# Altium PCB chargerNewD.PcbDoc
Units mm, origin at the board's own origin, x right, y up, seen from the top; angles counter-clockwise.
Board outline 152.4 x 101.6 mm, 2 copper layers (Top Layer, Bottom Layer); 20 components, 12 nets, 55 pads, 0 vias.
Unrouted connection lines stored in the file: 38.
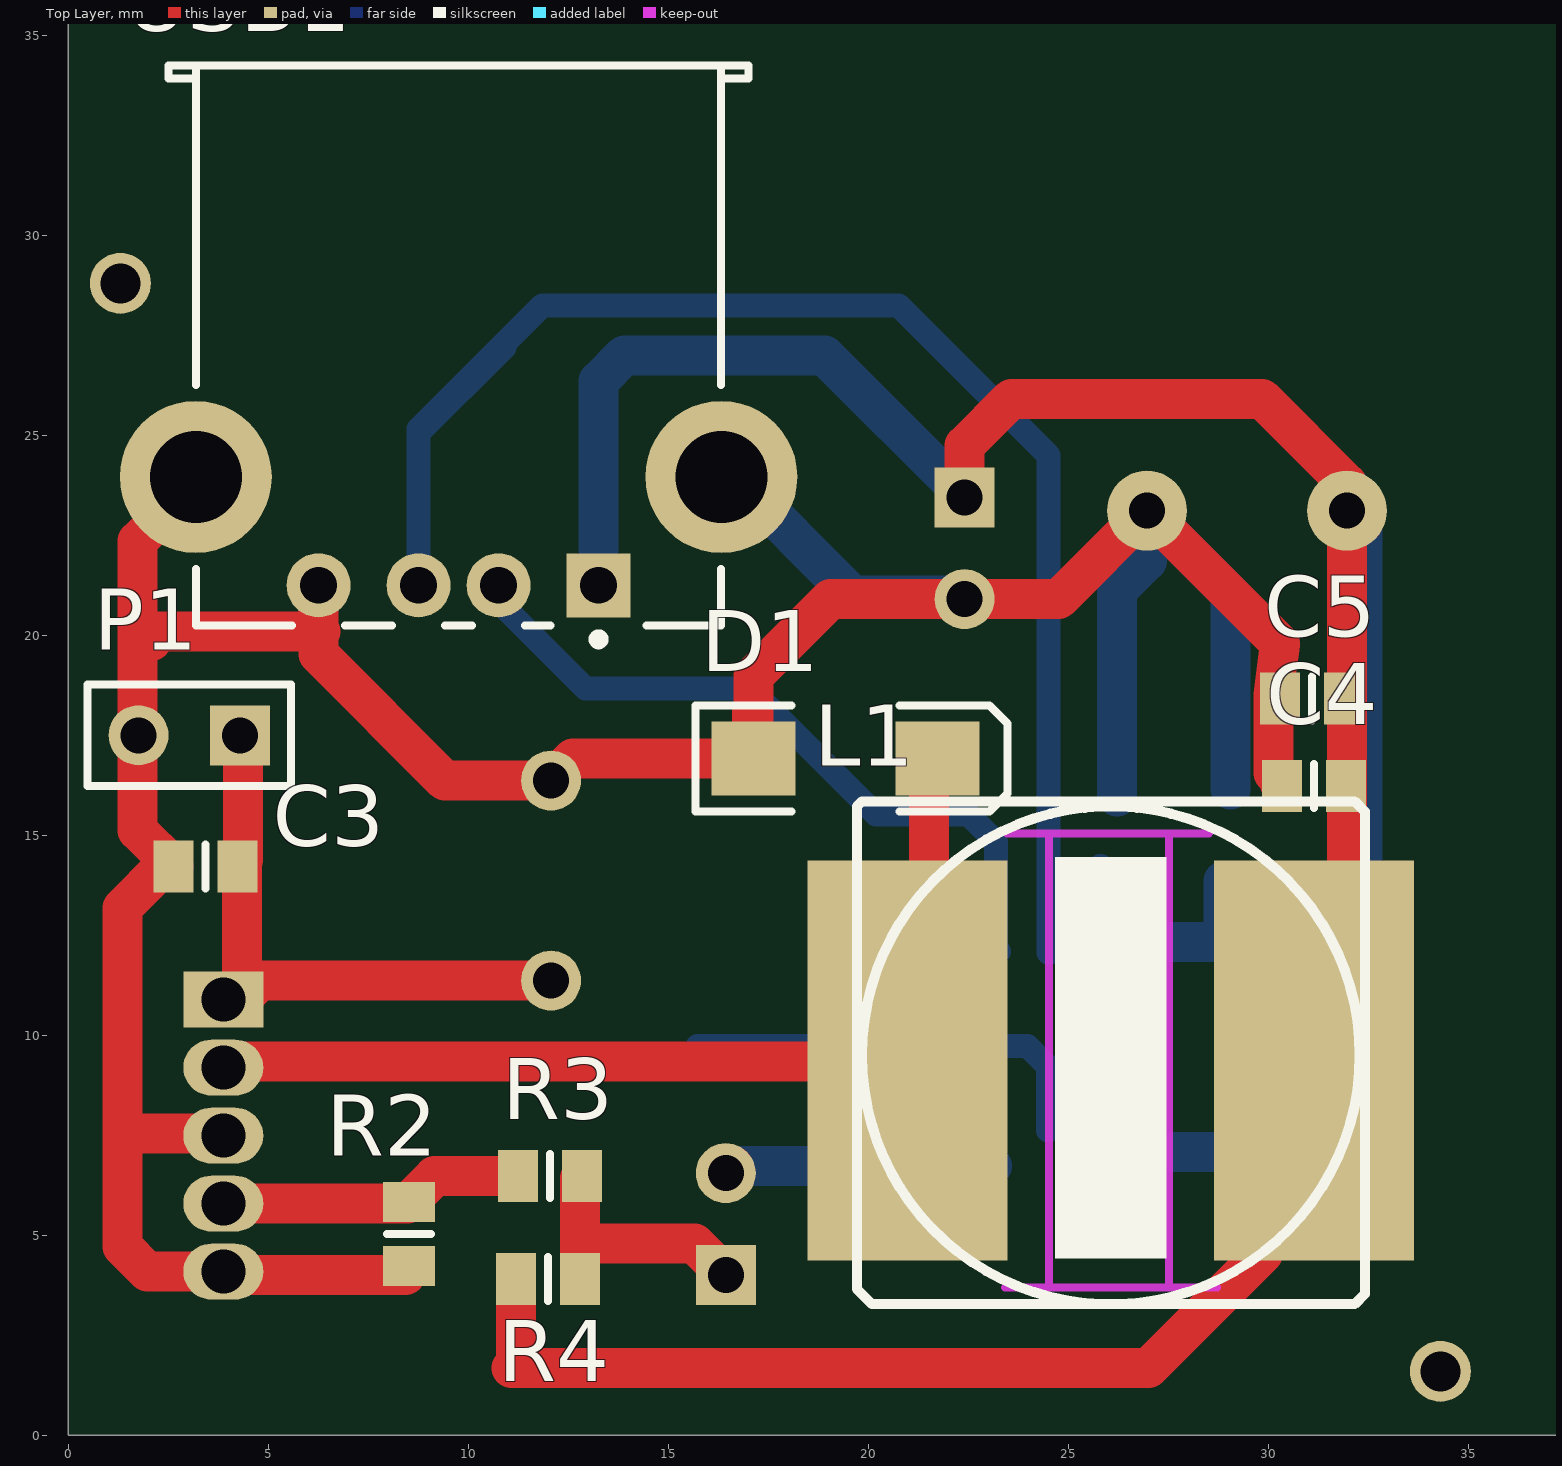
[diagram p0: Top Layer view]
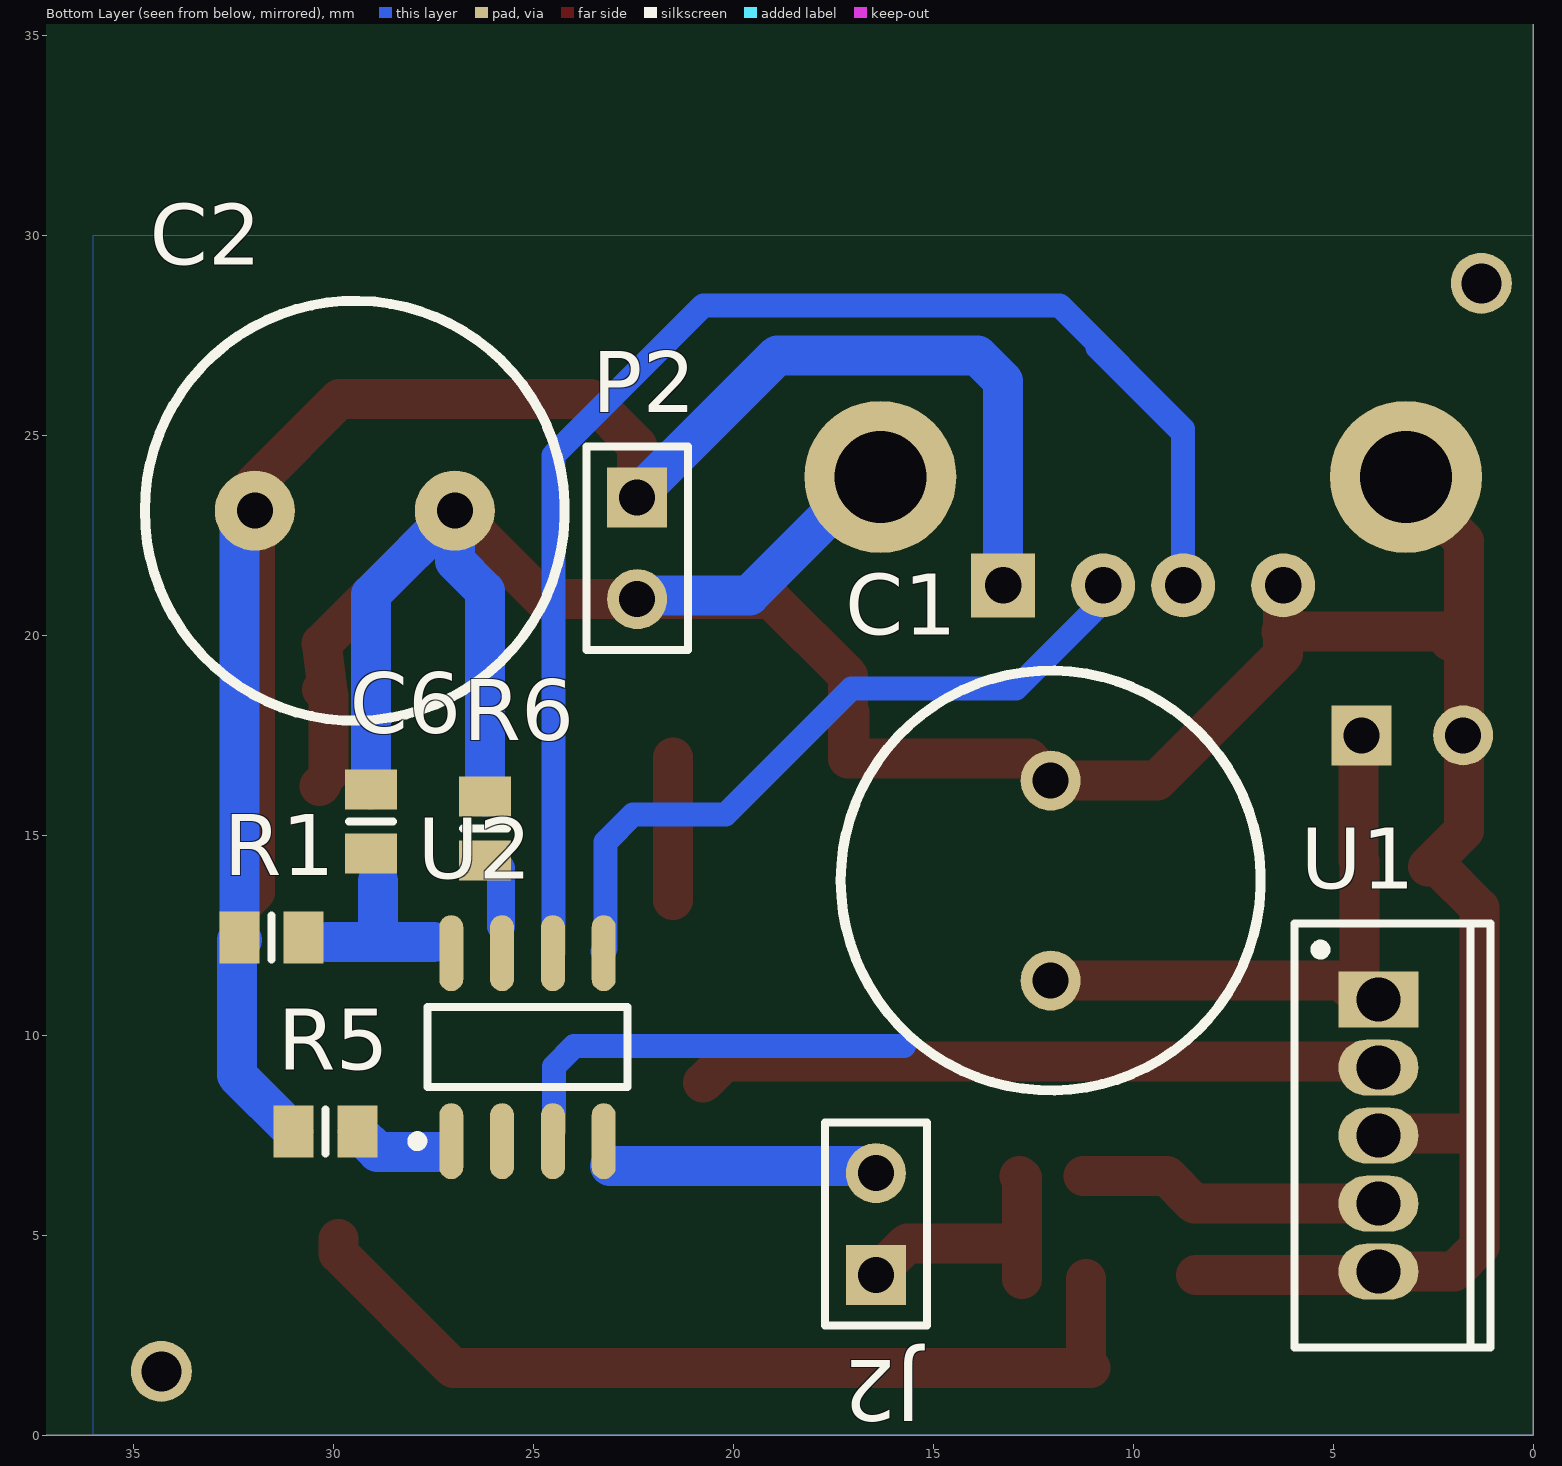
[diagram p1: Bottom Layer view, seen from below]

## Layer stack, top to bottom
Top Solder: solder mask 0.0102, Solder Resist, Dk 3.5
Top Layer: signal copper 0.0356
Dielectric 1: dielectric 0.32, FR-4, Dk 4.8
Bottom Layer: signal copper 0.0356
Bottom Solder: solder mask 0.0102, Solder Resist, Dk 3.5

## Board outline
0,0 152.4,0 152.4,101.6 0,101.6

## Design rules (kind name [scope] priority, off if disabled: settings)
Clearance [All] p1: gap=1.2 ignorepadtopadclearanceinfootprint=FALSE
PolygonConnect [All] p1: connectstyle=Relief reliefconductorwidth=0.254 reliefentries=4 polygonreliefangle="90 Angle" airgapwidth=0.254
RoutingVias [All] p1: holewidth=0.711 width=1.27 viastyle="Through Hole" minholewidth=0.711 minwidth=1.27 maxholewidth=0.711 maxwidth=1.27
SolderMaskExpansion [All] p1: expansion=0.102
Width [All] p1: maxlimit=0.762 minlimit=0.254 preferedwidth=0.254
30 further rules are at their usual default settings.

## Components (designator, comment, footprint, x,y, rotation, side; value= is the part's Value field where it differs from the comment)
C1 "Cap Pol1" RB5-10.5#1 12.065,13.868 r90 bottom value=470uf
C2 "Cap Pol1" RB5-10.5#2 29.464,23.114 r180 bottom value=470uf
C3 "Cap" 6-0805_L 3.429,14.224 r0 top value=100nf
C4 "Cap" 6-0805_L 31.14,16.231 r180 top value=100nf
C5 "Cap" 6-0805_L 31.09,18.415 r180 top value=100nf
C6 "Cap" 6-0805_L 29.058,15.342 r90 bottom value=100nf
D1 "SS34" DO214 19.431,16.916 r0 top
J2 "JUMPER" HDR1X2 16.434,4.013 r90 bottom
L1 "Inductor" IND_SMD-13.0mm 26.06,9.5 r0 top value=33mH
P1 "Header 2H" HDR1X2 4.293,17.501 r180 top
P2 "Header 2H" HDR1X2 22.403,23.444 r270 bottom
R1 "Res1" 6-0805_L 31.547,12.446 r0 bottom value=2K2
R2 "Res1" 6-0805_L 8.509,5.029 r90 top value=33k
R3 "Res1" 6-0805_L 12.04,6.477 r180 top value=1K
R4 "Res1" 6-0805_L 11.989,3.912 r0 top value=100K
R5 "Res1" 6-0805_L 30.201,7.595 r0 bottom value=2K2
R6 "Res1" 6-0805_L 26.213,15.164 r90 bottom value=38K3
U1 "LM2596-ADJ" T05A 3.872,7.493 r270 bottom
U2 "CHY103" "8 pin SOIC_L" 25.146,9.703 r90 bottom
USB1 "USB Connector-B Type" USB2.5-2H4C 9.754,34.239 r90 top

## Footprints (in the part's own frame and the unit in brackets; to place one, negate y for a bottom-side part, rotate by r counter-clockwise, add the part's x,y. Pads: shape width x height; smd on the part's side, far side on the other; paste and mask are expansions set on the pad)
6-0805_L [mm] "Chip Resistor, Body 2.0x1.2mm, IPC High Density"
  rect 1x1.3 smd: 1(-0.8,0) 2(0.8,0)
  silkscreen extent 0,-0.55 0,0.55, body extent -1.07,-0.7 1.07,0.7, height 0.7
"8 pin SOIC_L" [mm] "8-Pin Small Outline Integrated Circuit 1.27 mm Pitch, IPC High Density"
  oval 1.9x0.6 smd: 1(-2.35,1.905) 2(-2.35,0.635) 3(-2.35,-0.635) 4(-2.35,-1.905) 5(2.35,-1.905) 6(2.35,-0.635) 7(2.35,0.635) 8(2.35,1.905)
  silkscreen extent -2.47,-2.5 1,2.88, body extent -1.95,-2.45 1.95,2.45, height 1.91
DO214 [mm] "DO-214-AC/SMA; 2 C-Bend Leads; Body 5.3 x 2.6 mm, inc. leads (LxW)"
  rect 2.1x1.85 smd: 1(-2.3,0) 2(2.3,0)
  silkscreen extent -3.75,-1.33 4.05,1.33
HDR1X2 [mm] "Connector; Header; 2 Position"
  rect 1.5x1.5 hole 0.9: 1(0,0)
  round 1.5 hole 0.9: 2(2.54,0)
  silkscreen extent -1.27,-1.27 3.81,1.27
IND_SMD-13.0mm [mm]
  rect 5x10 smd: 1(-5.08,-0.127) 2(5.08,-0.127)
  Top Layer keep-out lines w0.2: -2.65,-5.8 2.65,-5.8 ; -2.6,5.55 2.45,5.55 ; -1.55,-5.8 -1.55,5.55 ; 1.45,-5.75 1.45,5.5
  silkscreen extent -6.35,-6.22 6.35,6.35, body extent -6.2,-6.3 6.3,6.2, height 6.1
RB5-10.5#1 [mm] "Capacitor (Radial); 2 Leads"
  round 1.5 hole 0.9: 1(-2.5,0) 2(2.5,0)
  silkscreen extent -5.25,-5.25 5.25,5.25
RB5-10.5#2 [mm] "Capacitor (Radial); 2 Leads"
  round 2 hole 0.9: 1(-2.5,0) 2(2.5,0)
  silkscreen extent -5.25,-5.25 5.25,5.25
T05A [mm] "TO, Thru-Hole, Vertical, Heatsink Mounted; 5 In-Line Leads; Pitch 1.70 mm"
  rect 1.4x2 hole 1.1: 1(-3.4,0)
  oval 1.4x2 hole 1.1: 2(-1.7,0) 3(0,0) 4(1.7,0) 5(3.4,0)
  silkscreen extent -5.3,-2.1 5.3,2.8, body extent -5.35,-2.15 5.35,2.85, height 15.9
USB2.5-2H4C [mm] "Connector; USB1.1, Type A, Thru-Hole; 4 Position; Right Angle"
  rect 1.6x1.6 hole 0.92: 1(-12.99,-3.5)
  round 1.6 hole 0.92: 2(-12.99,-1) 3(-12.99,1) 4(-12.99,3.5)
  round 3.8 hole 2.3: 5(-10.28,6.57) 6(-10.28,-6.57)
  silkscreen extent -14.46,-7.25 0,7.25, body extent -14,-7.25 0,7.25, height 7.01

## Part data
C1 C2: "Polarized Capacitor (Radial)", LatestRevisionDate=17-Jul-2002, LatestRevisionNote="Re-released for DXP Platform.", PackageDescription="Polarized Capacitor (Radial); 2 Leads", PackageReference=RB7.6-15, Published=8-Jun-2000, Publisher="Altium Limited"
C3 C4 C5 C6: "Capacitor", LatestRevisionDate=17-Jul-2002, LatestRevisionNote="Re-released for DXP Platform.", PackageDescription="Radial Cap, Thru-Hole; 2 Leads; 0.3 in Pin Spacing", PackageReference=RAD-0.3, Published=8-Jun-2000, Publisher="Altium Limited"
D1: library part Diode, "Default Diode", Code_JEDEC=DO-214-AB, LatestRevisionDate=17-Jul-2002, LatestRevisionNote="Re-released for DXP Platform.", PackageDescription="DO-214-AB/SMC; 2 C-Bend Leads; Body 7.9 x 5.9 mm, inc. leads (LxW)", PackageReference=SMC, PackageVersion=Sep-1996, Published=8-Jun-2000, Publisher="Altium Limited"
P1 P2: "Header, 2-Pin, Right Angle", LatestRevisionDate=17-Jul-2002, LatestRevisionNote="Re-released for DXP Platform.", Publisher="Altium Limited"
R1 R2 R3 R4 R5 R6: "Resistor", LatestRevisionDate=17-Jul-2002, LatestRevisionNote="Re-released for DXP Platform.", PackageDescription="Axial Device, Thru-Hole; 2 Leads; 0.3 in Pin Spacing", PackageReference=AXIAL-0.3, Published=8-Jun-2000, Publisher="Altium Limited"
U1: library part MOSFET-N3, "Two-Gate, N-Channel MOSFET, Externally Terminated Substrate", Code_JEDEC=TS-001-AA, LatestRevisionDate=17-Jul-2002, LatestRevisionNote="Re-released for DXP Platform.", PackageDescription="TO-220, Molded, 5 Lead, Straight", PackageReference=T05A, Published=24-Mar-1999, Publisher="Altium Limited"
J2: ="Jumper dip 2.54mm"
L1: Code_IEC=1005, Code_JEITA=0402, LatestRevisionDate=29-May-2009, LatestRevisionNote="IPC-7351 Footprint Added.", PackageDescription="Chip Inductor", PackageReference=0402-A, Published=8-Jun-2000, Publisher="Altium Limited"
USB1: ="USB type A"

## Free pads (board coordinates)
  round 1.524 hole 1: 11(1.3,28.8) 12(34.3,1.6)

## Nets (pads, with @x,y where several pads share a name; then routed paths per layer and width w, separated by ;. In a path a pad name is that pad's centre, name@x,y a point inside that pad or via, vN(x,y) a via of type N, cw(c..) or ccw(c..) an arc to the next point about the centre after c; other vN are vias at no path point)
GND: C1.2 C2.2 C3.1 C4.2 C5.2 C6.2 D1.1 P1.2 P2.2 pad.11 pad.12 R2.1 R6.1 U1.3 U1.5 U2.3 USB1.4 USB1.5 USB1.6
NetC6_1: C6.1 R1.1 U2.8
NetD1_2: D1.2 L1.2 U1.2
NetJ2_1: J2.1 R3.2 R4.1
NetJ2_2: J2.2 U2.4
NetR2_2: R2.2 R3.1 U1.4
NetR5_1: R5.1 U2.1
NetR6_2: R6.2 U2.7
NetU2_5: U2.5 USB1.2
NetU2_6: U2.6 USB1.3
V_OUT: C2.1 C4.1 C5.1 L1.1 P2.1 R1.2 R4.2 R5.2 USB1.1
VIN: C1.1 C3.2 P1.1 U1.1
pads on no net: U2.2
copper on no net: | length 302.1
  Top Layer w1: 1.422,7.544 3.821,7.544 3.872,7.493 ; 2.083,19.863 2.083,19.964 2.21,20.091 6.299,20.091 ; 3.048,23.673 1.727,22.352 1.727,17.247 1.727,15.126 2.629,14.224 2.388,14.224 1.346,13.183 1.346,4.724 1.978,4.093 3.872,4.093 3.952,4.013 8.433,4.013 ; 3.683,9.347 20.218,9.347 20.752,8.814 ; 3.872,5.793 8.473,5.793 8.509,5.829 9.157,6.477 11.24,6.477 ; 4.445,17.272 4.369,17.196 4.369,14.376 4.343,14.351 4.343,10.922 4.79,11.368 12.065,11.368 ; 6.254,21.249 6.254,19.527 9.413,16.368 12.065,16.368 12.613,16.916 17.131,16.916 17.131,18.985 19.05,20.904 24.754,20.904 26.964,23.114 30.29,19.788 30.124,18.491 ; 11.189,3.912 11.189,1.791 11.074,1.676 27,1.676 29.87,4.547 29.87,4.902 ; 12.789,3.912 12.789,6.426 12.84,6.477 ; 12.852,4.801 15.646,4.801 16.434,4.013 ; 16.434,6.553 16.612,6.731 ; 17.094,17.323 17.094,18.059 ; 21.514,13.386 21.514,16.942 ; 22.403,23.444 22.403,24.74 23.571,25.908 29.845,25.908 31.964,23.789 31.964,22.987 ; 30.124,16.561 30.124,18.491 ; 30.277,18.644 30.124,18.491 ; 30.29,16.281 30.34,16.231 ; 31.964,23.114 31.964,13.578 32.182,13.36
  Bottom Layer w0.6: 8.754,21.249 8.754,25.054 10.9,27.2 ; 8.754,25.154 11.85,28.25 20.75,28.25 24.5,24.5 24.5,12.064 24.511,12.053 ; 10.754,20.844 12.929,18.669 17.043,18.669 20.193,15.519 22.504,15.519 23.19,14.834 23.19,12.167 23.266,12.09 23.216,12.09 ; 15.728,9.728 18.705,9.728 23.978,9.728 24.486,9.22 24.486,7.62
  Bottom Layer w0.7: 25.806,12.725 25.806,14.186
  Bottom Layer w1: 13.254,21.249 13.254,26.354 13.9,27 18.9,27 22.403,23.497 22.403,23.444 ; 16.612,6.731 23.089,6.731 ; 16.641,23.959 19.6,21 22.307,21 22.403,20.904 ; 26.213,15.964 26.213,21.107 26.964,21.859 26.964,23.114 ; 26.568,23.114 26.964,23.114 ; 27.254,7.087 28.893,7.087 29.401,7.595 ; 27.496,12.332 30.15,12.332 ; 28.88,12.522 28.88,13.856 ; 29.058,16.142 29.058,21.02 26.964,23.114 ; 31.001,7.595 32.41,9.004 32.41,12.382 32.347,12.446 ; 31.964,23.114 32.347,22.731 32.347,12.446 ; 32.283,12.383 32.347,12.446

## Polygon pours and split planes (outlines as drawn)
no net on Bottom Layer "Bottom Layer-GND" (solid, remove dead copper, pour order 272): 0,0 36,0 36,30 0,30 0,0